# Altium PCB Cavro Ribbon Breakout.PcbDoc
Units mil, origin at the board's own origin, x right, y up, seen from the top; angles counter-clockwise.
Board outline 2900 x 1585 mil, 2 copper layers (Top Layer, Bottom Layer); 31 components, 31 nets, 101 pads, 46 vias.
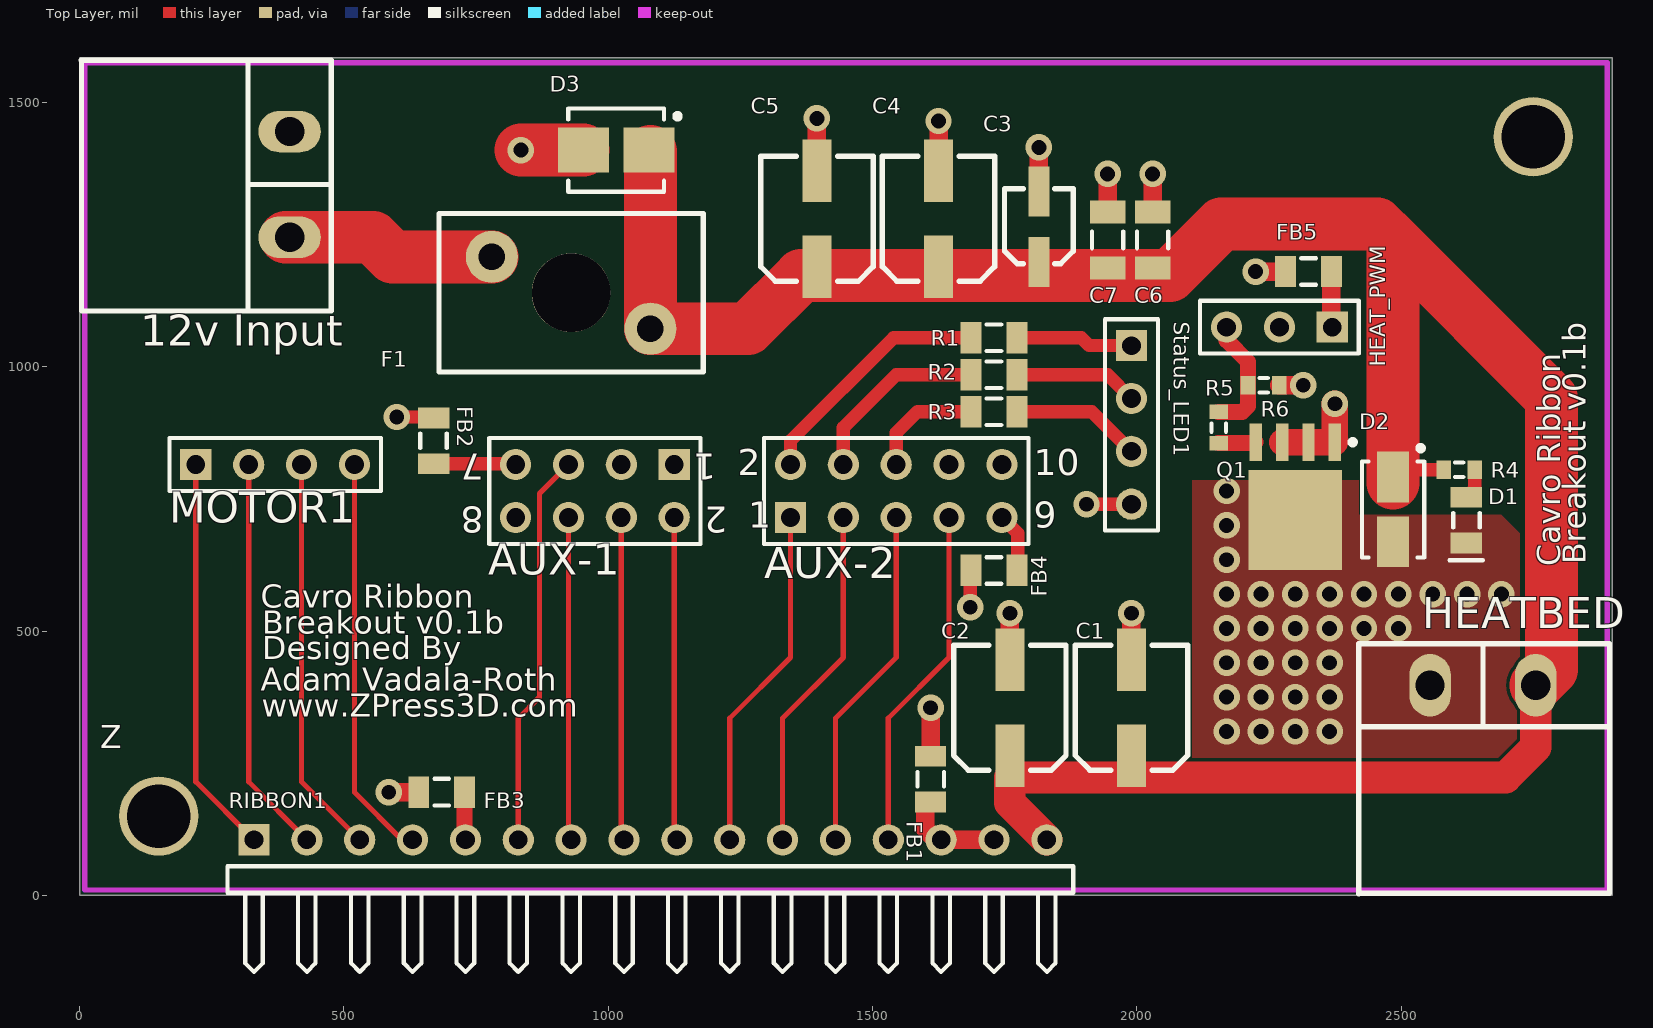
[diagram p0: Top Layer view]
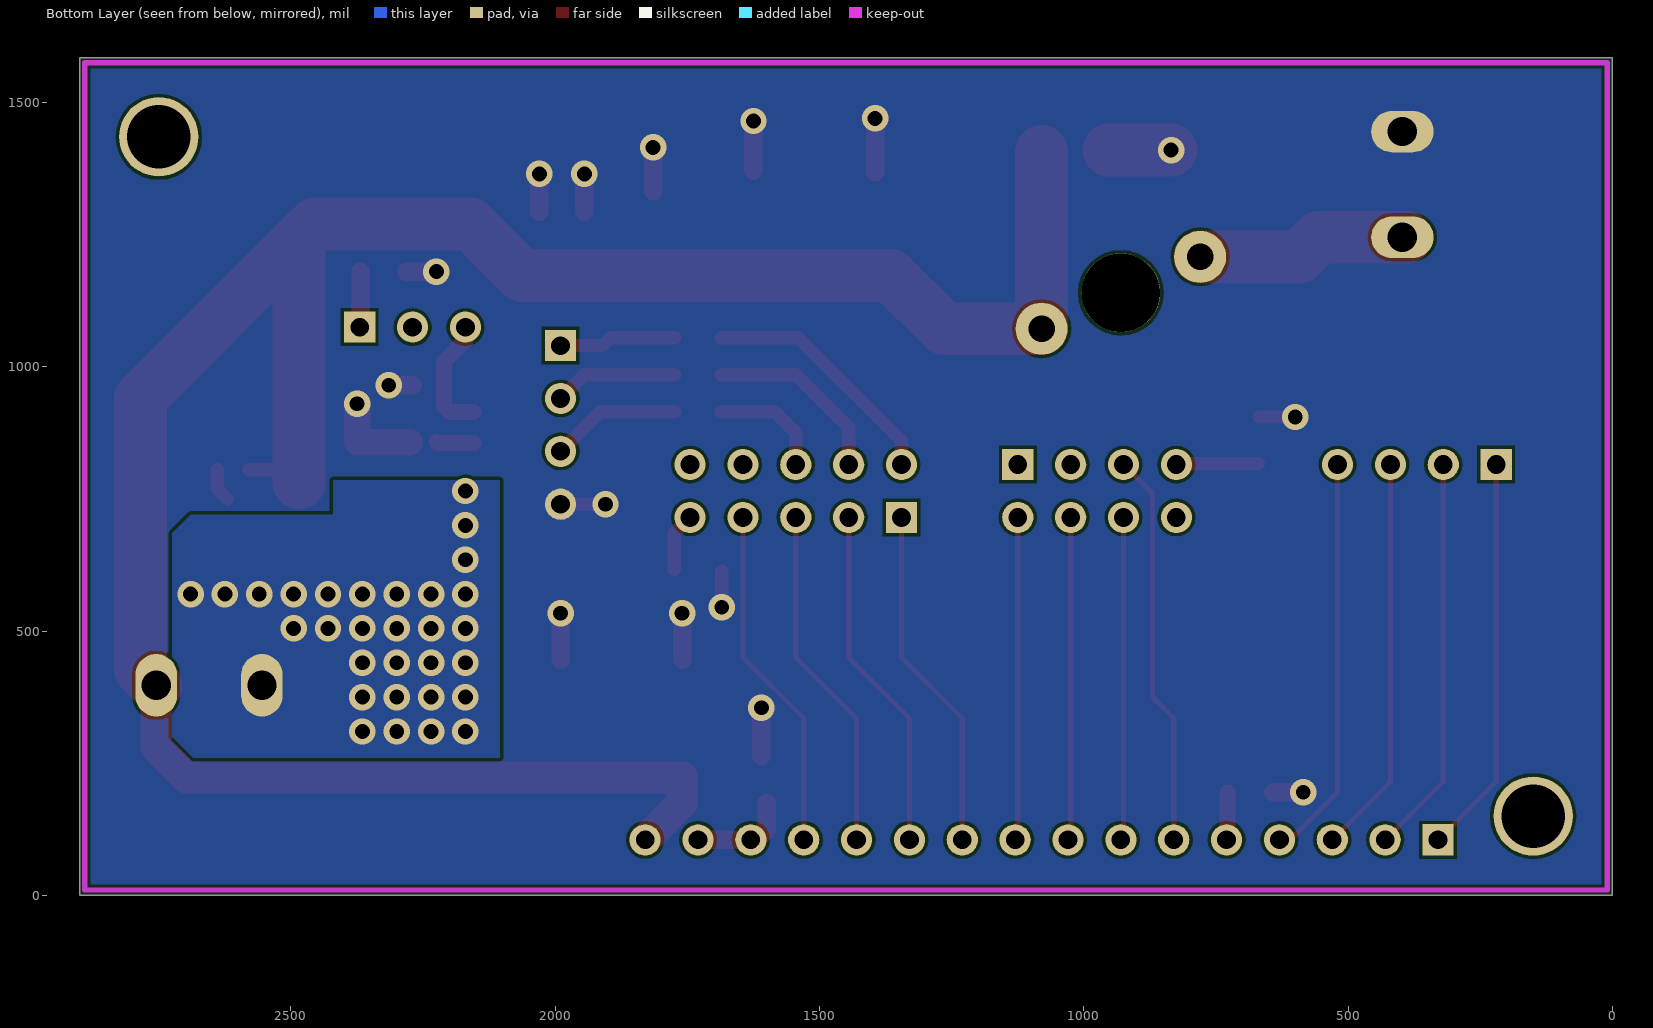
[diagram p1: Bottom Layer view, seen from below]

## Layer stack, top to bottom
Top Layer: signal copper 1.4
Dielectric: dielectric 12.6, FR-4, Dk 4.8
Bottom Layer: signal copper 1.4

## Board outline
0,0 0,1585 2900,1585 2900,0

## Design rules (kind name [scope] priority, off if disabled: settings)
Clearance [All] p1: gap=6
ComponentClearance [All] p1: gap=0 collisioncheckmode=3 verticalgap=10 showdistances=FALSE
FanoutControl Fanout_SOIC [(InComponent('U8') AND InComponent('U7'))] p3: bgadir=Out bgaviamode=Centered fanoutstyle=Staggered fanoutdirection=Alternating viagrid=1 // Fanout_SOIC (Default Rule)
FanoutControl Fanout_Small [All] p4: bgadir=Out bgaviamode=Centered fanoutstyle=Auto fanoutdirection=Alternating viagrid=1 // Fanout_Small (Default Rule)
HoleSize [All] p1: absolutevalues=TRUE maxlimit=120 minlimit=1 maxpercent=80.000 minpercent=20.000
MinimumSolderMaskSliver [All] p1 off: minsoldermaskwidth=10
PlaneConnect [All] p1: planeconnectstyle=Direct reliefexpansion=20 reliefentries=4 reliefconductorwidth=10 reliefairgap=10
PolygonConnect [All] p1: connectstyle=Direct reliefconductorwidth=45 reliefentries=4 polygonreliefangle="90 Angle" airgapwidth=10
RoutingVias [All] p1: holewidth=15 width=25 viastyle="Through Hole" minholewidth=15 minwidth=25 maxholewidth=28 maxwidth=50
SilkToSilkClearance [All] p1 off: silktosilkclearance=10
SilkToSolderMaskClearance SilkscreenOverComponentPads [IsPad] p1 off: minsilkscreentomaskgap=10 clearancetoexposedcopper=TRUE
SolderMaskExpansion [All] p1: expansion=4
Width [All] p1: maxlimit=200 minlimit=6 preferedwidth=6 bottomlayer_maxwidth=30 minimp=50.000000 maximp=50.000000 favimp=50.000000
20 further rules are at their usual default settings.

## Components (designator, comment, footprint, x,y, rotation, side; value= is the part's Value field where it differs from the comment)
"12v Input" "Pheonix Contact" con-phoenix-508 475,1580 r180 top
AUX-1 "Header 4X2" HDR2X4 1125,815 r180 top
AUX-2 "Header 5X2" HDR2X5 1345,715 r0 top
C1 "VS C" "Panasonic VS C" 1990,355 r270 top
C2 "VS C" "Panasonic VS C" 1760,355 r270 top
C3 "VAS C" "Panasonic VS B" 1815,1265 r270 top
C4 "VS C" "Panasonic VS C" 1625,1280 r270 top
C5 "VS C" "Panasonic VS C" 1395,1280 r270 top
C6 "1206" C1206 2030,1240 r270 top
C7 "1206" C1206 1945,1240 r270 top
D1 "LED1" "SM 0805 polarized" 2580,630 r90 top
D2 "B240A-13-F" B240A-13-F 2485,730 r270 top
D3 "S3A" S3A-Schottky 1015,1410 r0 top
F1 "MiniFuse 153008" TinyFuseATO_Carrier 930,1140 r90 top
FB1 "Ferrite" "SM 0805 - gap trimmed" 1610,220 r90 top
FB2 "Ferrite" "SM 0805 - gap trimmed" 670,860 r270 top
FB3 "Ferrite" "SM 0805 - gap trimmed" 685,195 r180 top
FB4 "Ferrite" "SM 0805 - gap trimmed" 1730,615 r0 top
FB5 "Ferrite" "SM 0805 - gap trimmed" 2325,1180 r180 top
HEAT_PWM "Header 3" HDR1X3 2370,1075 r180 top
HEATBED "Pheonix Contact" con-phoenix-508 2420,475 r270 top (schematic designator HEATBED_10A)
MOTOR1 "Header 4" HDR1X4 220,815 r0 top
Q1 "PSMN7R0-60YS" PSMN7R0-60YS 2300,755 r270 top
R1 "0805" "SM 0805 - gap trimmed" 1730,1055 r0 top
R2 "0805" "SM 0805 - gap trimmed" 1730,985 r0 top
R3 "0805" "SM 0805 - gap trimmed" 1730,915 r0 top
R4 "0603" J1-0603 2610,805 r180 top
R5 "0603" J1-0603 2155,885 r270 top
R6 "0603" J1-0603 2240,965 r0 top
RIBBON1 "Header 16H" HDR1X16H 330,105 r0 top
Status_LED1 "Header 4" HDR1X4 1990,1040 r270 top

## Footprints (in the part's own frame and the unit in brackets; to place one, negate y for a bottom-side part, rotate by r counter-clockwise, add the part's x,y. Pads: shape width x height; smd on the part's side, far side on the other; paste and mask are expansions set on the pad)
B240A-13-F [mm] "Molded Diode, 2-Leads, Body 4.30x2.60mm, IPC Medium Density"
  rect 2.45x1.55 smd: 1(-1.55,0) 2(1.55,0)
  silkscreen extent -3.07,-1.5 2.3,1.5, body extent -2.3,-1.46 2.3,1.46, height 2.3
C1206 [mm] "Chip Capacitor, Body 3.2x1.6mm, IPC High Density"
  rect 1.1x1.7 smd: 1(-1.35,0) 2(1.35,0)
  silkscreen extent -0.4,-0.75 0.4,0.75, body extent -1.7,-0.9 1.7,0.9, height 1.3
con-phoenix-508 [mm] "con-phoenix-508"
  oval 3x2 hole 1.4: 1(1.968,8.509) 2(1.968,3.429)
  silkscreen extent -0.03,0 12,12.05
HDR1X3 [mm] "Connector; Header; 3 Position"
  rect 1.5x1.5 hole 0.9: 1(0,0)
  round 1.5 hole 0.9: 2(2.54,0) 3(5.08,0)
  silkscreen extent -1.27,-1.27 6.35,1.27
HDR1X4 [mm] "Connector; Header; 4 Position"
  rect 1.5x1.5 hole 0.9: 1(0,0)
  round 1.5 hole 0.9: 2(2.54,0) 3(5.08,0) 4(7.62,0)
  silkscreen extent -1.27,-1.27 8.89,1.27
HDR1X16H [mm] "Connector; Header; 16 Position; Right Angle"
  rect 1.5x1.5 hole 0.9: 1(0,0)
  round 1.5 hole 0.9: 2(2.54,0) 3(5.08,0) 4(7.62,0) 5(10.16,0) 6(12.7,0) 7(15.24,0) 8(17.78,0) 9(20.32,0) 10(22.86,0) 11(25.4,0) 12(27.94,0) 13(30.48,0) 14(33.02,0) 15(35.56,0) 16(38.1,0)
  silkscreen extent -1.27,-6.35 39.37,-1.27
HDR2X4 [mm] "Connector; Header; 4x2 Position"
  rect 1.5x1.5 hole 0.9: 1(0,0)
  round 1.5 hole 0.9: 2(0,2.54) 3(2.54,0) 4(2.54,2.54) 5(5.08,0) 6(5.08,2.54) 7(7.62,0) 8(7.62,2.54)
  silkscreen extent -1.27,-1.27 8.89,3.81
HDR2X5 [mm] "Connector; Header; 5x2 Position"
  rect 1.5x1.5 hole 0.9: 1(0,0)
  round 1.5 hole 0.9: 2(0,2.54) 3(2.54,0) 4(2.54,2.54) 5(5.08,0) 6(5.08,2.54) 7(7.62,0) 8(7.62,2.54) 9(10.16,0) 10(10.16,2.54)
  silkscreen extent -1.27,-1.27 11.43,3.81
J1-0603 [mm] "Chip Resistor, Body 1.6x0.8mm, IPC High Density"
  rect 0.7x0.9 smd: 1(-0.75,0) 2(0.75,0)
  silkscreen extent -0.2,-0.35 0.2,0.35, body extent -0.85,-0.48 0.85,0.48, height 0.9
"Panasonic VS B" [mm]
  rect 2.4x1 smd: 1(1.7,0) 2(-1.7,0)
  silkscreen extent -1.83,-1.65 1.78,1.65
"Panasonic VS C" [mm]
  rect 3x1.4 smd: 1(2.3,0) 2(-2.3,0)
  silkscreen extent -3,-2.7 3,2.7
PSMN7R0-60YS [mm] "TO, 5-Pads, Body 5.15x5.86mm (max), IPC Medium Density"
  rect 1.8x0.6 smd: 1(-2.6,1.905) 2(-2.6,0.635) 3(-2.6,-0.635) 4(-2.6,-1.905)
  rect 4.8x4.5 smd: 5(1.14,0)
  silkscreen extent -2.72,2.63 -2.48,2.88, body extent -1.85,-2.5 2.25,2.5, height 1.2
S3A-Schottky [mm] "Molded Diode, 2-Leads, Body 4.31x3.62mm, IPC Medium Density"
  rect 2.45x2.15 smd: 1(-1.575,0) 2(1.575,0)
  silkscreen extent -2.3,-2 3.08,2, body extent -2.29,-1.97 2.28,1.97, height 2.5
"SM 0805 - gap trimmed" [mm]
  rect 1x1.5 smd: 1(-1.1,0) 2(1.1,0)
  silkscreen extent -0.36,-0.64 0.35,0.63
"SM 0805 polarized" [mm]
  rect 1x1.5 smd: 1(0.93,-1.105) 2(3.13,-1.105)
  silkscreen extent 0.1,-1.9 2.38,-0.3
TinyFuseATO_Carrier [mil] "TinyFuse ATO Automotive fuse holder 153008"
  round 98.43 hole 50: 1(-68,-150) 2(68,150)
  round 149 hole 149: ""(0,0)
  silkscreen extent -150,-250 150,250

## Part data
"12v Input" HEATBED: library part "Pheonix Contact 2X1"
AUX-1: "Header, 4-Pin, Dual row"
AUX-2: "Header, 5-Pin, Dual row"
C1 C2 C3 C4 C5: library part "Cap Pol1", "Polarized Capacitor (Radial)"
C6 C7: library part "Cap Semi", "Capacitor (Semiconductor SIM Model)"
D1: "Typical RED GaAs LED"
D2 D3: library part "D Schottky", "Schottky Diode"
F1: library part "Fuse 1", "Fuse"
FB1 FB2 FB3 FB4 FB5: library part Inductor, "Inductor"
HEAT_PWM: "Header, 3-Pin"
MOTOR1 Status_LED1: "Header, 4-Pin"
Q1: "N-Channel MOSFET"
R1 R2 R3 R4 R5 R6: library part Res3, "Resistor"
RIBBON1: "Header, 16-Pin, Right Angle"

## Free pads (board coordinates)
  round 150 hole 120: 1(150,150) 1(2750,1435)

## Via types
v1: diameter 50, hole 28, Top Layer to Bottom Layer, 46 vias

## Nets (pads, with @x,y where several pads share a name; then routed paths per layer and width w, separated by ;. In a path a pad name is that pad's centre, name@x,y a point inside that pad or via, vN(x,y) a via of type N, cw(c..) or ccw(c..) an arc to the next point about the centre after c; other vN are vias at no path point)
+12VCC: C1.1 C2.1 C3.1 C4.1 C5.1 C6.2 C7.2 D2.1 D3.2 F1.1 HEATBED.1 R4.2 RIBBON1.16 | length 4625.1
  Top Layer w25: D2.1@2498.98,805 R4.2
  Top Layer w60: RIBBON1.16 1760,175 1760,223.07 2698.07,223.07 2755,280 HEATBED.1
  Top Layer w100: D3.2@1080,1407.01 F1.1 1264.36,1072 1365,1172.64 ; C5.1@1378.19,1172.64 2062.64,1172.64 2160,1270 2455,1270 2485,1240 ; D2.1@2485,780 D2.1 2485,1240 ; HEATBED.1 2785,427.52 2785,940 2485,1240
A+: MOTOR1.1 RIBBON1.1 | length 755.6
  Top Layer w10: MOTOR1.1 220,215 RIBBON1.1
A-: MOTOR1.4 RIBBON1.4 | length 767.3
  Top Layer w10: MOTOR1.4 520,195 610,105 RIBBON1.4
B+: MOTOR1.2 RIBBON1.2 | length 755.6
  Top Layer w10: MOTOR1.2 320,215 RIBBON1.2
B-: MOTOR1.3 RIBBON1.3 | length 755.6
  Top Layer w10: MOTOR1.3 420,215 RIBBON1.3
CS_T2: AUX-1.2 RIBBON1.9 | length 612.1
  Top Layer w10: AUX-1.2 1125,110 RIBBON1.9
CS_T3: AUX-2.1 RIBBON1.10 | length 657.6
  Top Layer w10: RIBBON1.10 1230,335 1345,450 AUX-2.1
CS_T4: AUX-2.3 RIBBON1.11 | length 657.6
  Top Layer w10: RIBBON1.11 1330,335 1445,450 AUX-2.3
ES1: AUX-2.5 RIBBON1.12 | length 657.6
  Top Layer w10: RIBBON1.12 1430,335 1545,450 AUX-2.5
ES2: AUX-2.7 RIBBON1.13 | length 657.6
  Top Layer w10: RIBBON1.13 1530,335 1645,450 AUX-2.7
GND: "12v Input.2" C1.2 C2.2 C3.2 C4.2 C5.2 C6.1 C7.1 D3.1 FB1.2 FB2.1 FB3.2 FB4.1 FB5.2 Q1.1 Q1.2 Q1.3 R6.2 Status_LED1.4 | length 1362
  Top Layer w25: v1(600,905) FB2.1@668.31,905 ; v1(1685,545) FB4.1@1685,613.31 ; v1(1905,740) Status_LED1.4
  Top Layer w35: v1(585,195) FB3.2 ; C5.2@1395,1368.15 v1(1395,1470) ; FB1.2 v1(1610,355) ; C4.2 v1(1625,1465) ; C2.2 v1(1760,533.62) ; C3.2 v1(1815,1415) ; C7.1 v1(1945,1365) ; C1.2 v1(1990,533.62) ; C6.1 v1(2030,1365) ; v1(2225,1180) FB5.2 ; R6.2 v1(2315,965)
  Top Layer w50: Q1.3 Q1.2 Q1.1 v1(2375,930)
  Top Layer w100: v1(835,1410) D3.1
MOSI: AUX-1.4 RIBBON1.8 | length 612.1
  Top Layer w10: RIBBON1.8@1020,105 1025,110 AUX-1.4
"Net12v Input_1": "12v Input.1" F1.2 | length 405.3
  Top Layer w100: 390,1245 555,1245 592,1208 F1.2
NetAUX-1_7: AUX-1.7 FB2.2 | length 153.3
  Top Layer w25: FB2.2 AUX-1.7@823.31,816.69
NetAUX-2_8: AUX-2.8
NetAUX-2_9: AUX-2.9 FB4.2 | length 113.1
  Top Layer w10: FB4.2 FB4.2@1775,616.69
  Top Layer w25: AUX-2.9 1775,685 FB4.2@1775,616.69
NetD1_1: D1.1 D2.2 HEATBED.2 Q1.5
  other v1: 2170,310 2235,310 2300,310 2365,310 2170,375 2235,375 2300,375 2365,375 2170,440 2235,440 2300,440 2365,440 2170,505 2235,505 2300,505 2365,505 2430,505 2495,505 2170,570 2235,570 2300,570 2365,570 2430,570 2495,570 2560,570 2625,570 2690,570 2170,635 2170,700 2170,765
NetD1_2: D1.2 R4.1 | length 63
  Top Layer w25: D1.2@2620.28,750 2639.53,769.25 R4.1
NetFB1_1: FB1.1 RIBBON1.14 RIBBON1.15 | length 186.6
  Top Layer w35: FB1.1@1600,175 1600,125 1620,105 RIBBON1.14 ; RIBBON1.14@1631.69,105 RIBBON1.15
NetFB3_1: FB3.1 RIBBON1.5 | length 88.3
  Top Layer w30: RIBBON1.5@728.31,106.69 FB3.1
NetFB5_1: FB5.1 HEAT_PWM.1 | length 103.3
  Top Layer w35: HEAT_PWM.1@2368.31,1076.69 FB5.1
NetHEAT_PWM_3: HEAT_PWM.3 R5.1 R6.1 | length 226.3
  Top Layer w30: R5.1 2199.53,914.53 2210.47,925.47 R6.1 2210.47,1009.53 2170,1050 HEAT_PWM.3
NETLABEL14: AUX-1.6 RIBBON1.7 | length 620
  Top Layer w10: RIBBON1.7@925,95 925,330 AUX-1.6
NETLABEL15: AUX-1.5 RIBBON1.6 | length 749.4
  Top Layer w10: RIBBON1.6 830,335 870,375 870,760 AUX-1.5
NetQ1_4: Q1.4 R5.2 | length 70.8
  Top Layer w30: R5.2 2223.11,855.47 Q1.4
NetR1_2: R1.2 Status_LED1.1 | length 222.9
  Top Layer w25: R1.2 1895,1055 1910,1040 Status_LED1.1
NetR2_2: R2.2 Status_LED1.2 | length 235.3
  Top Layer w25: R2.2 1945,985 Status_LED1.2
NetR3_2: R3.2 Status_LED1.3 | length 247.8
  Top Layer w25: R3.2 1915,915 Status_LED1.3
STATUS_BLUE: AUX-2.4 R2.1 | length 353.1
  Top Layer w25: AUX-2.4 1445,885 1545,985 R2.1
STATUS_GREEN: AUX-2.6 R3.1 | length 218.3
  Top Layer w25: AUX-2.6 1545,875 1585,915 R3.1
STATUS_RED: AUX-2.2 R1.1 | length 467.5
  Top Layer w25: AUX-2.2 1345,860 1540,1055 R1.1
pads on no net: AUX-1.1 AUX-1.3 AUX-1.8 AUX-2.10 F1. HEAT_PWM.2

## Polygon pours and split planes (outlines as drawn)
NetD1_1 on Top Layer "Top Layer-No Net" (solid, remove dead copper, pour order 5): 2105,260 2105,785 2420,785 2420,720 2690,720 2725,685 2725,300 2685,260
GND on Bottom Layer "Top Layer-No Net" (solid, remove dead copper, pour order 11): 0,1585 0,0 2900,0 2900,1585
NetD1_1 on Bottom Layer "Top Layer-No Net" (solid, remove dead copper, pour order 5): 2105,260 2105,785 2420,785 2420,720 2690,720 2725,685 2725,300 2685,260

## Keep-outs
Keep-Out Layer:
  lines w10: 10,10 10,1575 2890,1575 2890,10 10,10

## Silkscreen, mask and mechanical layers (free items; w line width, h text height)
Top Overlay:
  text "Breakout v0.1b" at 2865,626 h75 r90
  text "Cavro Ribbon" at 2816,623 h75 r90
  text "Cavro Ribbon" at 343,529 h75
  text "Breakout v0.1b" at 346,480 h75
  text "Designed By" at 346,432 h75
  text "Adam Vadala-Roth" at 343,372 h75
  text "www.ZPress3D.com" at 345,323 h75
  text "Z" at 39,263 h75
Mechanical 15:
  the board outline again, w10

## Text inside footprints (layer, text, board x,y; h text height)
AUX-1: Top Overlay "2" at 1225,735 h50 r180; Top Overlay "1" at 1205,835 h50 r180; Top Overlay "7" at 765,835 h50 r180; Top Overlay "8" at 765,735 h50 r180
AUX-2: Top Overlay "10" at 1805,795 h50; Top Overlay "9" at 1805,695 h50; Top Overlay "1" at 1265,695 h50; Top Overlay "2" at 1245,795 h50